# Altium PCB A540R260_Arm6.PcbDoc (part 1 of 2)
Units mm, origin at the board's own origin, x right, y up, seen from the top; angles counter-clockwise.
Board outline 130.45 x 60.2 mm, 4 copper layers (Top Layer, 5V, GND, Bottom Layer), stack 1.741 mm thick; 110 components, 164 nets, 536 pads, 150 vias.
Unrouted connection lines stored in the file: 3.
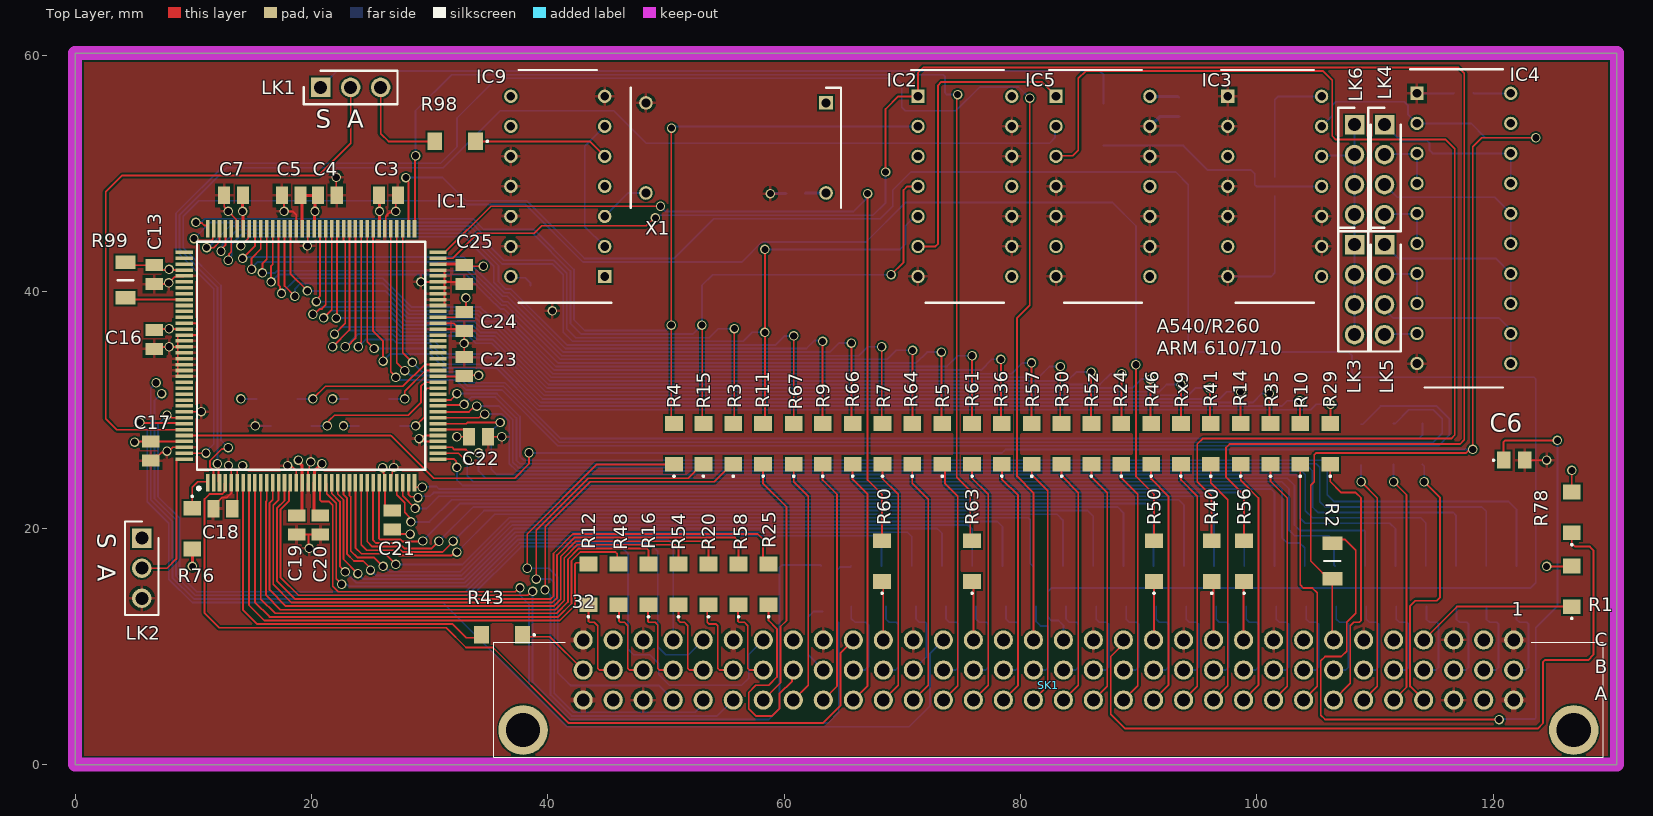
[diagram p0: Top Layer view]
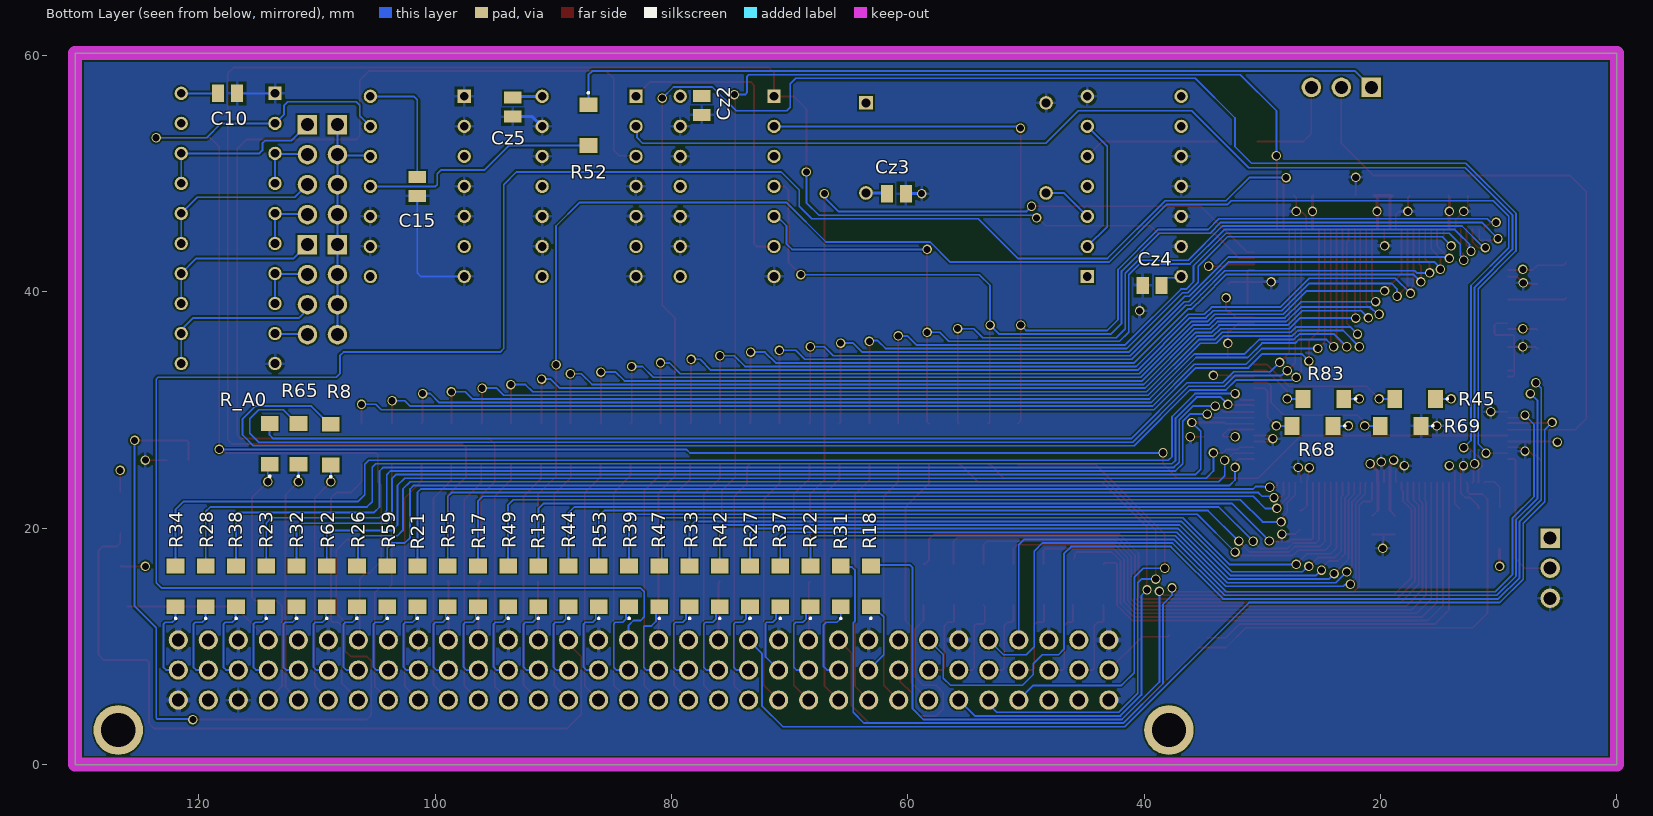
[diagram p1: Bottom Layer view, seen from below]
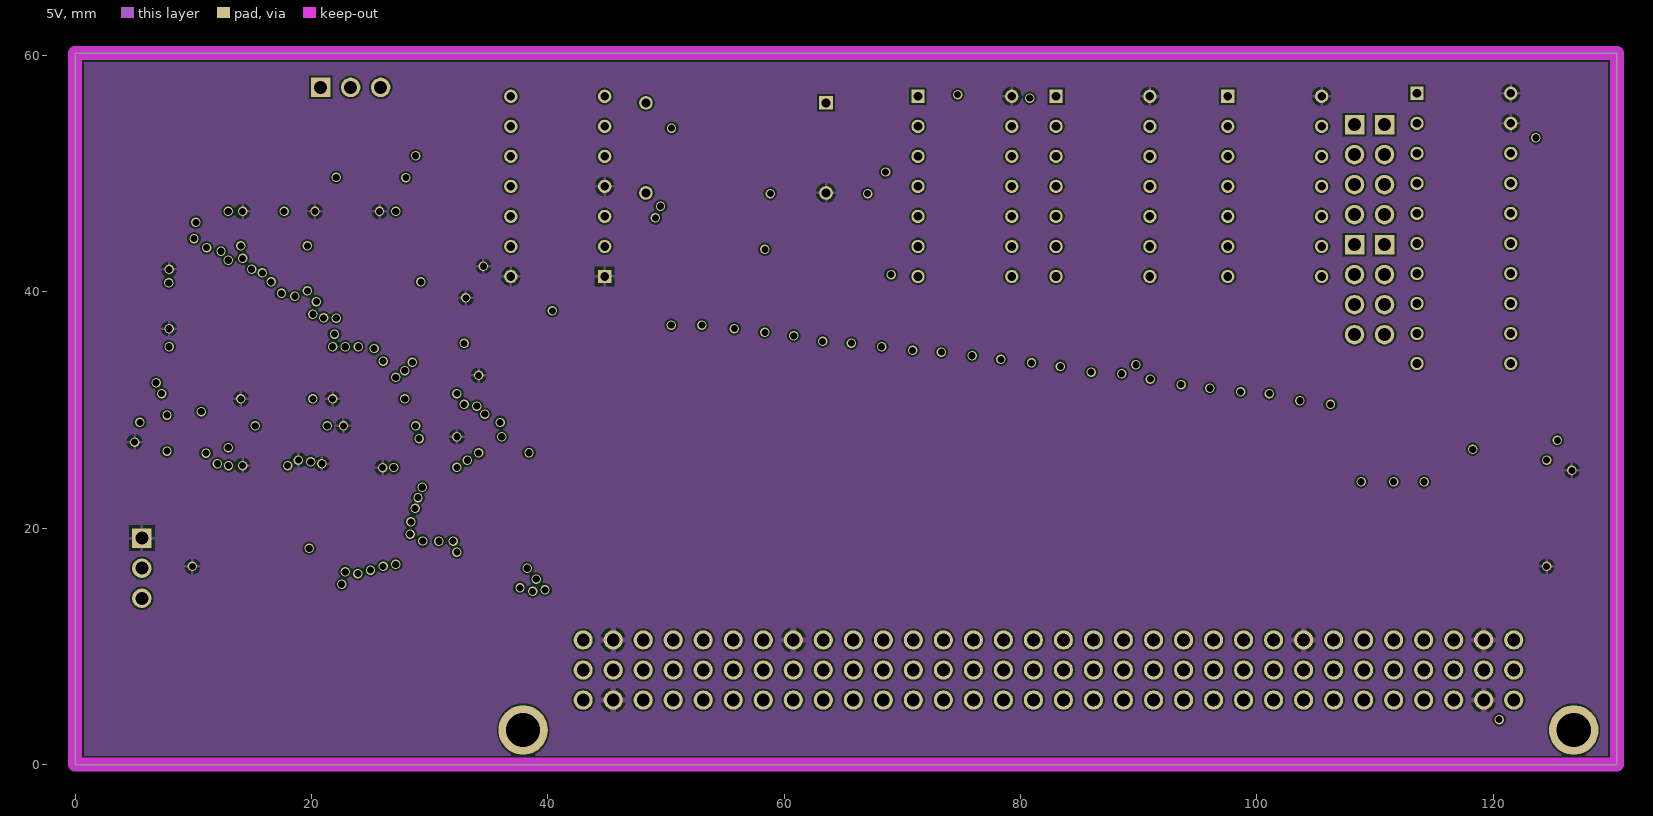
[diagram p2: 5V]
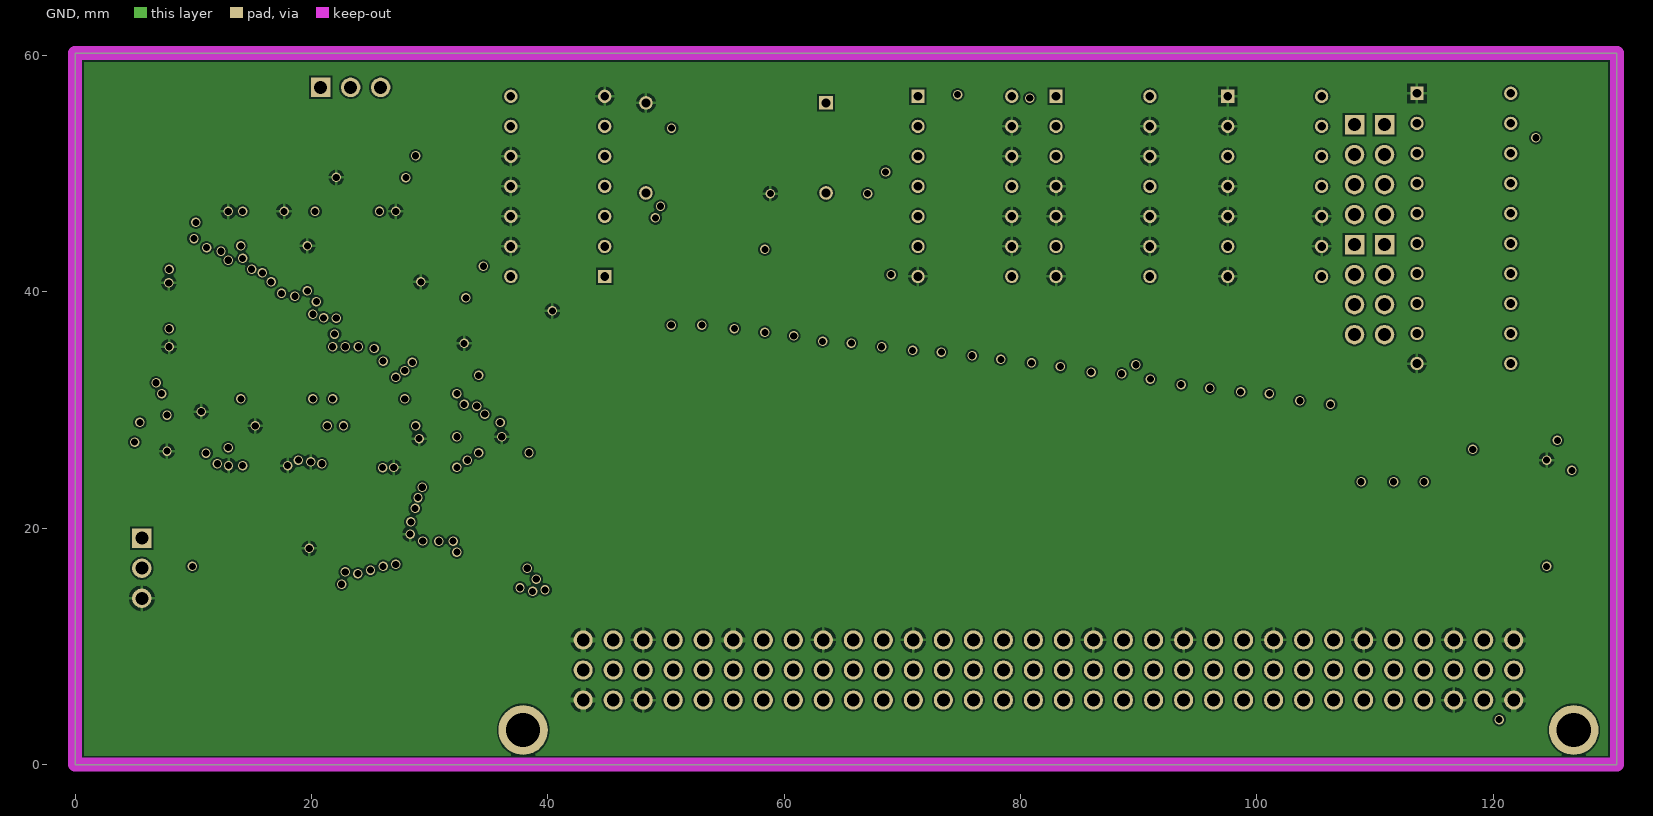
[diagram p3: GND]
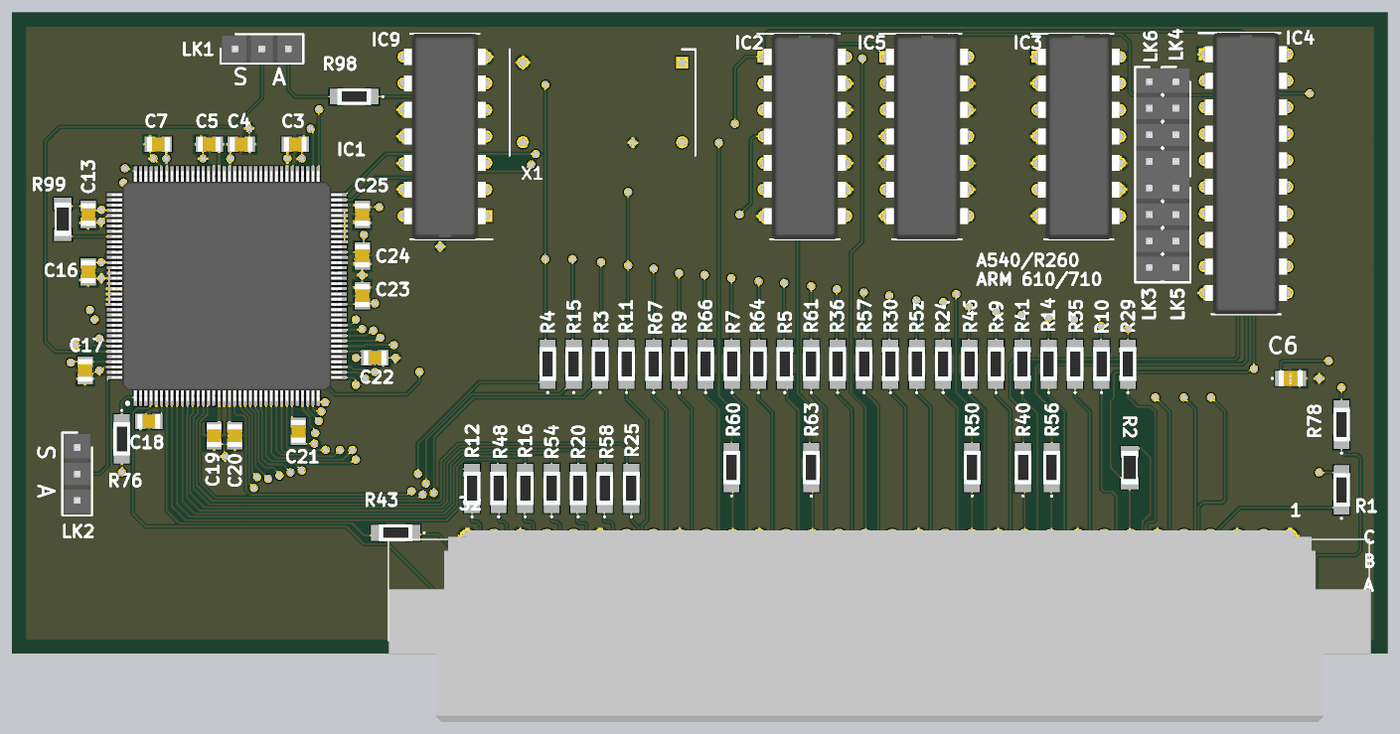
[diagram p5: 3D render of the assembled board from above, using the file's embedded part models]
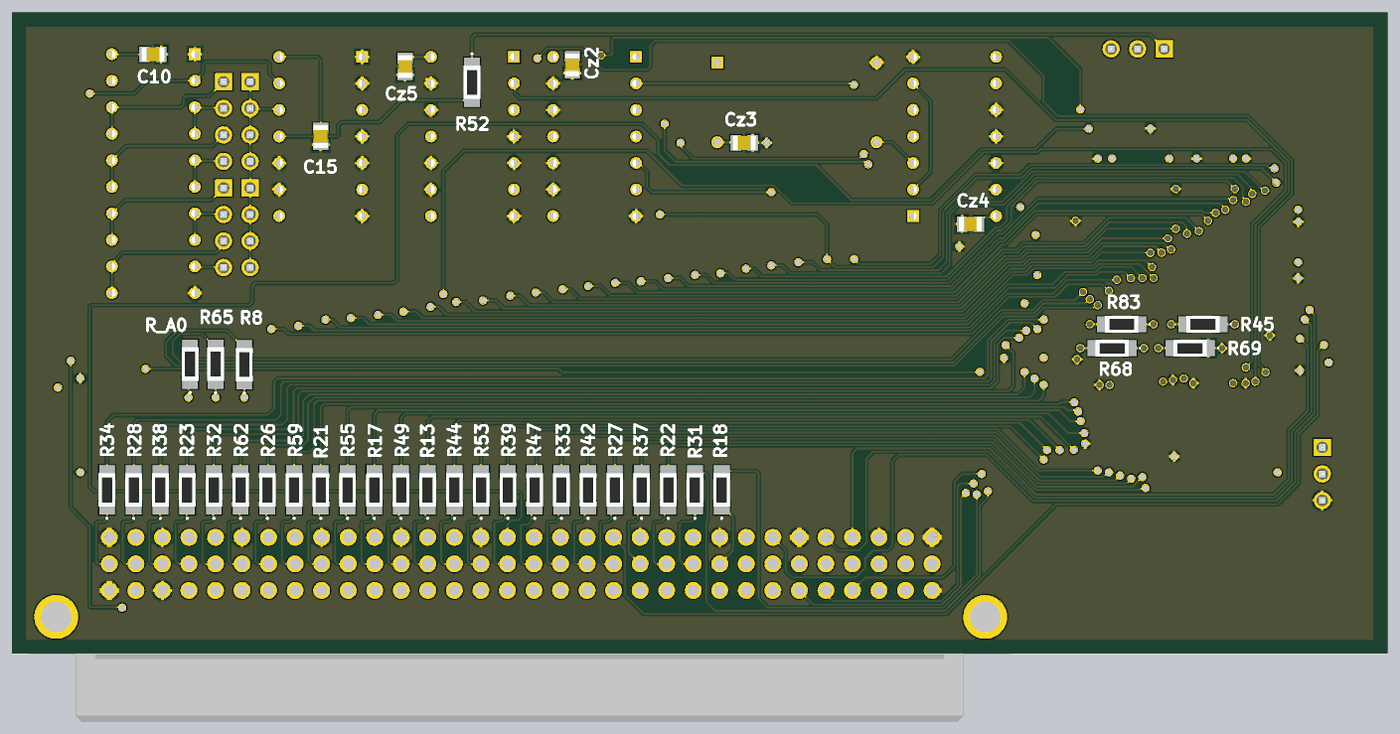
[diagram p6: 3D render of the assembled board from below, using the file's embedded part models]

## Layer stack, top to bottom
Top Solder: solder mask 0.0102, Solder Resist, Dk 3.5
Top Layer: signal copper 0.0356
Dielectric 1: dielectric 0.2, FR-4, Dk 4.8
5V: signal copper 0.035
Dielectric 2: core 1.2, PP-006, Dk 4.1
GND: signal copper 0.035
Dielectric2: dielectric 0.2, FR-4, Dk 4.8
Bottom Layer: signal copper 0.0356
Bottom Solder: solder mask 0.0102, Solder Resist, Dk 3.5

## Board outline
0,60.198 0,0 130.454,0 130.454,60.198

## Design rules (kind name [scope] priority, off if disabled: settings)
Clearance [All] p1: gap=0.152 ignorepadtopadclearanceinfootprint=FALSE
HoleSize [All] p1: absolutevalues=TRUE maxlimit=12.7 minlimit=0.025 maxpercent=80.000 minpercent=20.000
HoleToHoleClearance [All] p1: gap=0.152 allowstackedmicrovias=TRUE
MinimumSolderMaskSliver [All] p1: minsoldermaskwidth=0.025
PolygonConnect [All] p1: connectstyle=Relief reliefconductorwidth=0.254 reliefentries=4 polygonreliefangle="90 Angle" airgapwidth=0.254
RoutingVias [All] p1: holewidth=0.3 width=0.6 viastyle="Through Hole" minholewidth=0.711 minwidth=1.27 maxholewidth=0.711 maxwidth=1.27
SilkToSilkClearance [All] p1 off: silktosilkclearance=0.254
SilkToSolderMaskClearance [IsPad] p1: minsilkscreentomaskgap=0.025 clearancetoexposedcopper=TRUE
SolderMaskExpansion [All] p1: expansion=0.102 istentingtop=FALSE
SupplyNets "Schematic Supply Nets_1" [InNet('5V')] p1: voltage=0.000
SupplyNets "Schematic Supply Nets" [InNet('GND')] p2: voltage=0.000
Width [All] p1: maxlimit=0.254 minlimit=0.152 preferedwidth=0.152
25 further rules are at their usual default settings.

## Classes and differential pairs
component class Glue: C10 C15 Cz2 Cz3 Cz4 Cz5 IC2 IC3 IC4 IC5 IC9 LK3 LK4 LK5 LK6 R52 R98 X1
component class Arm: C3 C4 C5 C6 C7 C13 C16 C17 C18 C19 C20 C21 C22 C23 C24 C25 IC1 LK1 LK2 R1 R2 R3 R4 R5 R5z R7 R8 R9 R10 R11 R12 R13 R14 R15 R16 R17 R18 R20 R21 R22 R23 R24 R25 R26 R27 R28 R29 R30 R31 R32 R33 R34 R35 R36 R37 R38 R39 R40 R41 R42 R43 R44 R45 R46 R47 R48 R49 R50 R53 R54 R55 R56 R57 R58 R59 R60 R61 R62 R63 R64 R65 R66 R67 R68 R69 R76 R78 R83 R99 R_A0 Rx9 SK1 SK?

## Components (designator, comment, footprint, x,y, rotation, side; value= is the part's Value field where it differs from the comment)
C3 "100nF 0805" CAPC2012X140N 26.518,48.158 r180 top
C4 "100nF 0805" CAPC2012X140N 21.336,48.158 r180 top
C5 "100nF 0805" CAPC2012X140N 18.288,48.158 r0 top
C6 "22pF" C0805 121.768,25.756 r0 top
C7 "100nF 0805" CAPC2012X140N 13.411,48.158 r0 top
C10 "100nF 0805" CAPC2012X140N 117.551,56.794 r0 bottom
C13 "100nF 0805" CAPC2012X140N 6.706,41.453 r90 top
C15 "100nF 0805" CAPC2012X140N 101.498,48.92 r90 bottom
C16 "100nF 0805" CAPC2012X140N 6.706,35.966 r90 top
C17 "100nF 0805" CAPC2012X140N 6.401,26.518 r90 top
C18 "100nF 0805" CAPC2012X140N 12.497,21.641 r0 top
C19 "100nF 0805" CAPC2012X140N 18.745,20.269 r90 top
C20 "100nF 0805" CAPC2012X140N 20.726,20.269 r90 top
C21 "100nF 0805" CAPC2012X140N 26.822,20.688 r90 top
C22 "100nF 0805" CAPC2012X140N 34.138,27.737 r180 top
C23 "100nF 0805" CAPC2012X140N 32.918,33.68 r270 top
C24 "100nF 0805" CAPC2012X140N 32.918,37.49 r90 top
C25 "100nF 0805" CAPC2012X140N 32.918,41.453 r90 top
Cz2 "100nF 0805" CAPC2012X140N 77.419,55.778 r90 bottom
Cz3 "100nF 0805" CAPC2012X140N 60.96,48.311 r0 bottom
Cz4 "100nF" CAPC2012X140N 39.319,40.538 r0 bottom
Cz5 "100nF 0805" CAPC2012X140N 93.421,55.626 r90 bottom
IC1 "ARM610" TQFP144 19.964,34.595 r90 top locked
IC2 "SN74HC20N" DIP794W53P254L1930H508Q14N 75.286,48.92 r0 top locked
IC3 "SN74AC86NE4" DIP794W53P254L1930H508Q14N 101.498,48.92 r0 top locked
IC4 "SN74AC241NE4" DIP794W53P254L2540H508Q20N 117.508,45.364 r0 top locked
IC5 "SN74ACT08N-NG" DIP794W53P254L1930H508Q14N 86.97,48.92 r0 top locked
IC9 "CD74ACT74E" DIP794W53P254L1930H508Q14N 40.836,48.92 r180 top
LK1 "PREC003SAAN-RC" HDRV3W64P0X254_1X3_762X254X868P 20.777,57.302 r0 top
LK2 "PREC003SAAN-RC" HDRV3W64P0X254_1X3_762X254X868P 5.639,19.152 r270 top
LK3 "PREC004SAAN-RC" HDRV4W64P0X254_1X4_1016X254X854P 108.255,43.993 r90 top locked
LK4 "PREC004SAAN-RC" HDRV4W64P0X254_1X4_1016X254X854P 110.795,54.153 r90 top locked
LK5 "PREC004SAAN-RC" HDRV4W64P0X254_1X4_1016X254X854P 110.795,43.993 r90 top locked
LK6 "PREC004SAAN-RC" HDRV4W64P0X254_1X4_1016X254X854P 108.255,54.153 r90 top locked
R1 "10K 1206" ERJUP8 126.644,15.088 r90 top
R2 "100R 1206" RESC3216X70N 106.375,17.221 r90 top
R3 "22R 1206" ERJUP8 55.688,27.127 r90 top
R4 "22R 1206" ERJUP8 50.673,27.127 r90 top
R5 "22R 1206" ERJUP8 73.366,27.127 r90 top
R5z "22R 1206" ERJUP8 85.993,27.127 r90 top
R7 "22R 1206" ERJUP8 68.315,27.127 r90 top
R8 "22R 1206" ERJUP8 108.814,27.079 r90 bottom
R9 "22R 1206" ERJUP8 63.264,27.127 r90 top
R10 "22R 1206" ERJUP8 103.672,27.127 r90 top
R11 "22R 1206" ERJUP8 58.213,27.127 r90 top
R12 "22R 1206" ERJUP8 43.434,15.24 r90 top
R13 "22R 1206" ERJUP8 91.258,15.088 r90 bottom
R14 "22R 1206" ERJUP8 98.621,27.127 r90 top
R15 "22R 1206" ERJUP8 53.162,27.127 r90 top
R16 "22R 1206" ERJUP8 48.514,15.24 r90 top
R17 "22R 1206" ERJUP8 96.374,15.088 r90 bottom
R18 "22R 1206" ERJUP8 63.119,15.088 r90 bottom
R20 "22R 1206" ERJUP8 53.594,15.24 r90 top
R21 "22R 1206" ERJUP8 101.49,15.088 r90 bottom
R22 "22R 1206" ERJUP8 68.235,15.088 r90 bottom
R23 "22R 1206" ERJUP8 114.28,15.088 r90 bottom
R24 "22R 1206" ERJUP8 88.519,27.127 r90 top
R25 "22R 1206" ERJUP8 58.674,15.24 r90 top
R26 "22R 1206" ERJUP8 106.606,15.088 r90 bottom
R27 "22R 1206" ERJUP8 73.351,15.088 r90 bottom
R28 "22R 1206" ERJUP8 119.396,15.088 r90 bottom
R29 "22R 1206" ERJUP8 106.197,27.127 r90 top
R30 "22R 1206" ERJUP8 83.468,27.127 r90 top
R31 "22R 1206" ERJUP8 65.677,15.088 r90 bottom
R32 "22R 1206" ERJUP8 111.722,15.088 r90 bottom
R33 "22R 1206" ERJUP8 78.467,15.088 r90 bottom
R34 "22R 1206" ERJUP8 121.954,15.088 r90 bottom
R35 "22R 1206" ERJUP8 101.146,27.127 r90 top
R36 "22R 1206" ERJUP8 78.417,27.127 r90 top
R37 "22R 1206" ERJUP8 70.793,15.088 r90 bottom
R38 "22R 1206" ERJUP8 116.838,15.088 r90 bottom
R39 "22R 1206" ERJUP8 83.583,15.088 r90 bottom
R40 "22R 1206" ERJUP8 96.164,17.221 r90 top
R41 "22R 1206" ERJUP8 96.095,27.127 r90 top
R42 "22R 1206" ERJUP8 75.909,15.088 r90 bottom
R43 "22R 1206" ERJUP8 36.119,10.973 r180 top
R44 "22R 1206" ERJUP8 88.7,15.088 r90 bottom
R45 "10K 1206" ERJUP8 17.069,30.937 r0 bottom
R46 "22R 1206" ERJUP8 91.044,27.127 r90 top
R47 "22R 1206" ERJUP8 81.025,15.088 r90 bottom
R48 "22R 1206" ERJUP8 45.974,15.24 r90 top
R49 "22R 1206" ERJUP8 93.816,15.088 r90 bottom
R50 "22R 1206" ERJUP8 91.288,17.221 r90 top
R52 "22R 1206" ERJUP8 87.02,54.102 r270 bottom
R53 "22R 1206" ERJUP8 86.141,15.088 r90 bottom
R54 "22R 1206" ERJUP8 51.054,15.24 r90 top
R55 "22R 1206" ERJUP8 98.932,15.088 r90 bottom
R56 "22R 1206" ERJUP8 98.908,17.221 r90 top
R57 "22R 1206" ERJUP8 80.943,27.127 r90 top
R58 "22R 1206" ERJUP8 56.134,15.24 r90 top
R59 "22R 1206" ERJUP8 104.048,15.088 r90 bottom
R60 "22R 1206" ERJUP8 68.275,17.221 r90 top
R61 "22R 1206" ERJUP8 75.892,27.127 r90 top
R62 "22R 1206" ERJUP8 109.164,15.088 r90 bottom
R63 "22R 1206" ERJUP8 75.895,17.221 r90 top
R64 "22R 1206" ERJUP8 70.841,27.127 r90 top
R65 "22R 1206" ERJUP8 111.557,27.127 r90 bottom
R66 "22R 1206" ERJUP8 65.79,27.127 r90 top
R67 "22R 1206" ERJUP8 60.808,27.127 r90 top
R68 "10K 1206" ERJUP8 25.756,28.651 r0 bottom
R69 "10K 1206" ERJUP8 18.288,28.651 r0 bottom
R76 "10K 1206" ERJUP8 9.906,19.964 r270 top
R78 "10K 1206" ERJUP8 126.644,21.336 r90 top
R83 "10K 1206" ERJUP8 24.841,30.937 r0 bottom
R98 "22R 1206" ERJUP8 32.156,52.73 r180 top
R99 "100R 1206" RESC3216X70N 4.267,40.996 r270 top
R_A0 "22R 1206" ERJUP8 113.995,27.127 r90 bottom
Rx9 "22R 1206" ERJUP8 93.57,27.127 r90 top
SK1 "5650461-4 / 5650895-4" 56504614 121.727,5.461 r0 top locked
X1 "60MHz OSC" DIPS762W56P1524L1778H241Q4N 63.537,55.987 r270 top

## Footprints (in the part's own frame and the unit in brackets; to place one, negate y for a bottom-side part, rotate by r counter-clockwise, add the part's x,y. Pads: shape width x height; smd on the part's side, far side on the other; paste and mask are expansions set on the pad)
56504614 [mm]
  round 1.62 hole 1.08: A1(0,0) A2(-2.54,0) A3(-5.08,0) A4(-7.62,0) A5(-10.16,0) A6(-12.7,0) A7(-15.24,0) A8(-17.78,0) A9(-20.32,0) A10(-22.86,0) A11(-25.4,0) A12(-27.94,0) A13(-30.48,0) A14(-33.02,0) A15(-35.56,0) A16(-38.1,0) A17(-40.64,0) A18(-43.18,0) A19(-45.72,0) A20(-48.26,0) A21(-50.8,0) A22(-53.34,0) A23(-55.88,0) A24(-58.42,0) A25(-60.96,0) A26(-63.5,0) A27(-66.04,0) A28(-68.58,0) A29(-71.12,0) A30(-73.66,0) A31(-76.2,0) A32(-78.74,0) B1(0,2.54) B2(-2.54,2.54) B3(-5.08,2.54) B4(-7.62,2.54) B5(-10.16,2.54) B6(-12.7,2.54) B7(-15.24,2.54) B8(-17.78,2.54) B9(-20.32,2.54) B10(-22.86,2.54) B11(-25.4,2.54) B12(-27.94,2.54) B13(-30.48,2.54) B14(-33.02,2.54) B15(-35.56,2.54) B16(-38.1,2.54) B17(-40.64,2.54) B18(-43.18,2.54) B19(-45.72,2.54) B20(-48.26,2.54) B21(-50.8,2.54) B22(-53.34,2.54) B23(-55.88,2.54) B24(-58.42,2.54) B25(-60.96,2.54) B26(-63.5,2.54) B27(-66.04,2.54) B28(-68.58,2.54) B29(-71.12,2.54) B30(-73.66,2.54) B31(-76.2,2.54) B32(-78.74,2.54) C1(0,5.08) C2(-2.54,5.08) C3(-5.08,5.08) C4(-7.62,5.08) C5(-10.16,5.08) C6(-12.7,5.08) C7(-15.24,5.08) C8(-17.78,5.08) C9(-20.32,5.08) C10(-22.86,5.08) C11(-25.4,5.08) C12(-27.94,5.08) C13(-30.48,5.08) C14(-33.02,5.08) C15(-35.56,5.08) C16(-38.1,5.08) C17(-40.64,5.08) C18(-43.18,5.08) C19(-45.72,5.08) C20(-48.26,5.08) C21(-50.8,5.08) C22(-53.34,5.08) C23(-55.88,5.08) C24(-58.42,5.08) C25(-60.96,5.08) C26(-63.5,5.08) C27(-66.04,5.08) C28(-68.58,5.08) C29(-71.12,5.08) C30(-73.66,5.08) C31(-76.2,5.08) C32(-78.74,5.08)
  round 4.2 hole 2.89: MH1(5.08,-2.54) MH2(-83.82,-2.54)
  silkscreen extent -86.31,-4.83 7.57,4.88, body extent -86.26,-12.61 7.72,5.75, height 9.21
C0805 [mm]
  rect 1.15x1.45 smd: 1(-0.9,0) 2(0.9,0)
  silkscreen extent -1.8,-0.05 -1.7,0.05, body extent -1.15,-0.78 1.15,0.77, height 0.98
CAPC2012X140N [mm]
  rect 1.02x1.47 smd: 1(-0.8,0) 2(0.8,0)
  body extent -1.1,-0.7 1.1,0.7, height 1.45
DIP794W53P254L1930H508Q14N [mm]
  rect 1.13x1.13 hole 0.73: 1(-3.97,7.62)
  round 1.13 hole 0.73: 2(-3.97,5.08) 3(-3.97,2.54) 4(-3.97,0) 5(-3.97,-2.54) 6(-3.97,-5.08) 7(-3.97,-7.62) 8(3.97,-7.62) 9(3.97,-5.08) 10(3.97,-2.54) 11(3.97,0) 12(3.97,2.54) 13(3.97,5.08) 14(3.97,7.62)
  silkscreen extent -4.53,-9.84 3.3,9.84, body extent -3.94,-9.84 3.94,9.84, height 5.27
DIP794W53P254L2540H508Q20N [mm]
  rect 1.13x1.13 hole 0.73: 1(-3.97,11.43)
  round 1.13 hole 0.73: 2(-3.97,8.89) 3(-3.97,6.35) 4(-3.97,3.81) 5(-3.97,1.27) 6(-3.97,-1.27) 7(-3.97,-3.81) 8(-3.97,-6.35) 9(-3.97,-8.89) 10(-3.97,-11.43) 11(3.97,-11.43) 12(3.97,-8.89) 13(3.97,-6.35) 14(3.97,-3.81) 15(3.97,-1.27) 16(3.97,1.27) 17(3.97,3.81) 18(3.97,6.35) 19(3.97,8.89) 20(3.97,11.43)
  silkscreen extent -4.53,-13.46 3.3,13.46, body extent -3.94,-13.46 3.94,13.46, height 5.09
DIPS762W56P1524L1778H241Q4N [mm]
  rect 1.15x1.15 hole 0.75: 1(0,0)
  round 1.15 hole 0.75: 2(0,-15.24) 4(7.62,0) ""(7.62,-15.24)
  silkscreen extent -1.27,-16.51 8.89,1.27
ERJUP8 [mm]
  rect 1.25x1.5 smd: 1(-1.725,0) 2(1.725,0)
  silkscreen extent -2.77,-0.05 -2.68,0.05, body extent -1.6,-0.8 1.6,0.8, height 0.6
HDRV3W64P0X254_1X3_762X254X868P [mm]
  rect 1.65x1.65 hole 1.1: 1(0,0)
  round 1.65 hole 1.1: 2(2.54,0) 3(5.08,0)
  silkscreen extent -1.42,-1.42 6.5,1.42, body extent -1.27,-1.27 6.35,1.27, height 8.68
HDRV4W64P0X254_1X4_1016X254X854P [mm]
  rect 1.65x1.65 hole 1.1: 1(0,0)
  round 1.65 hole 1.1: 2(-2.54,0) 3(-5.08,0) 4(-7.62,0)
  silkscreen extent -9.04,-1.37 1.42,1.37, body extent -8.89,-1.27 1.27,1.27, height 8.54
RESC3216X70N [mm]
  rect 1.15x1.7 smd: 1(-1.5,0) 2(1.5,0)
  silkscreen extent 0,-0.67 0,0.67, body extent -1.6,-0.8 1.6,0.8, height 0.6
TQFP144 [mm]
  rect 1.475x0.3 smd: 1(-10.738,8.75) 2(-10.738,8.25) 3(-10.738,7.75) 4(-10.738,7.25) 5(-10.738,6.75) 6(-10.738,6.25) 7(-10.738,5.75) 8(-10.738,5.25) 9(-10.738,4.75) 10(-10.738,4.25) 11(-10.738,3.75) 12(-10.738,3.25) 13(-10.738,2.75) 14(-10.738,2.25) 15(-10.738,1.75) 16(-10.738,1.25) 17(-10.738,0.75) 18(-10.738,0.25) 19(-10.738,-0.25) 20(-10.738,-0.75) 21(-10.738,-1.25) 22(-10.738,-1.75) 23(-10.738,-2.25) 24(-10.738,-2.75) 25(-10.738,-3.25) 26(-10.738,-3.75) 27(-10.738,-4.25) 28(-10.738,-4.75) 29(-10.738,-5.25) 30(-10.738,-5.75) 31(-10.738,-6.25) 32(-10.738,-6.75) 33(-10.738,-7.25) 34(-10.738,-7.75) 35(-10.738,-8.25) 36(-10.738,-8.75) 73(10.738,-8.75) 74(10.738,-8.25) 75(10.738,-7.75) 76(10.738,-7.25) 77(10.738,-6.75) 78(10.738,-6.25) 79(10.738,-5.75) 80(10.738,-5.25) 81(10.738,-4.75) 82(10.738,-4.25) 83(10.738,-3.75) 84(10.738,-3.25) 85(10.738,-2.75) 86(10.738,-2.25) 87(10.738,-1.75) 88(10.738,-1.25) 89(10.738,-0.75) 90(10.738,-0.25) 91(10.738,0.25) 92(10.738,0.75) 93(10.738,1.25) 94(10.738,1.75) 95(10.738,2.25) 96(10.738,2.75) 97(10.738,3.25) 98(10.738,3.75) 99(10.738,4.25) 100(10.738,4.75) 101(10.738,5.25) 102(10.738,5.75) 103(10.738,6.25) 104(10.738,6.75) 105(10.738,7.25) 106(10.738,7.75) 107(10.738,8.25) 108(10.738,8.75)
  rect 0.3x1.475 smd: 37(-8.75,-10.738) 38(-8.25,-10.738) 39(-7.75,-10.738) 40(-7.25,-10.738) 41(-6.75,-10.738) 42(-6.25,-10.738) 43(-5.75,-10.738) 44(-5.25,-10.738) 45(-4.75,-10.738) 46(-4.25,-10.738) 47(-3.75,-10.738) 48(-3.25,-10.738) 49(-2.75,-10.738) 50(-2.25,-10.738) 51(-1.75,-10.738) 52(-1.25,-10.738) 53(-0.75,-10.738) 54(-0.25,-10.738) 55(0.25,-10.738) 56(0.75,-10.738) 57(1.25,-10.738) 58(1.75,-10.738) 59(2.25,-10.738) 60(2.75,-10.738) 61(3.25,-10.738) 62(3.75,-10.738) 63(4.25,-10.738) 64(4.75,-10.738) 65(5.25,-10.738) 66(5.75,-10.738) 67(6.25,-10.738) 68(6.75,-10.738) 69(7.25,-10.738) 70(7.75,-10.738) 71(8.25,-10.738) 72(8.75,-10.738) 109(8.75,10.738) 110(8.25,10.738) 111(7.75,10.738) 112(7.25,10.738) 113(6.75,10.738) 114(6.25,10.738) 115(5.75,10.738) 116(5.25,10.738) 117(4.75,10.738) 118(4.25,10.738) 119(3.75,10.738) 120(3.25,10.738) 121(2.75,10.738) 122(2.25,10.738) 123(1.75,10.738) 124(1.25,10.738) 125(0.75,10.738) 126(0.25,10.738) 127(-0.25,10.738) 128(-0.75,10.738) 129(-1.25,10.738) 130(-1.75,10.738) 131(-2.25,10.738) 132(-2.75,10.738) 133(-3.25,10.738) 134(-3.75,10.738) 135(-4.25,10.738) 136(-4.75,10.738) 137(-5.25,10.738) 138(-5.75,10.738) 139(-6.25,10.738) 140(-6.75,10.738) 141(-7.25,10.738) 142(-7.75,10.738) 143(-8.25,10.738) 144(-8.75,10.738)
  silkscreen extent -11.35,-9.65 9.65,9.65, body extent -11,-11 11,11, height 1.51

## Part data
C3 C4 C5 C7 C10 C13 C15 C16 C17 C18 C19 C20 C21 C22 C23 C24 C25 Cz2 Cz3 Cz5: library part C0805C104J4JACAUTO, "Capacitor", Manufacturer_Name=KEMET, Mouser Part Number=80-C0805C104J4JAUTO, Arrow Part Number=C0805C104J4JACAUTO, Arrow Price/Stock=https://www.arrow.com/en/products/c0805c104j4jacauto/kemet-corporation?region=nac, Datasheet Link=https://content.kemet.com/datasheets/KEM_C1091_C0G_ESD.pdf, Height=1.4mm, Manufacturer_Part_Number=C0805C104J4JACAUTO, Mouser Price/Stock=https://www.mouser.co.uk/ProductDetail/KEMET/C0805C104J4JACAUTO?qs=MyNHzdoqoQKNICuQqAIXfA%3D%3D
C6: library part C0805X220K3GACTU, "Capacitor", Manufacturer_Name=KEMET, Datasheet Link=https://content.kemet.com/datasheets/KEM_C1062_C0G_FT-CAP_SMD.pdf, Height=1.1mm, Manufacturer_Part_Number=C0805X220K3GACTU
Cz4: library part C2012X7R1H104K125AM, "Capacitor", Manufacturer_Name=TDK, Mouser Part Number=810-C2012X7R1H104KT5, Arrow Part Number=C2012X7R1H104K125AM, Arrow Price/Stock=https://www.arrow.com/en/products/c2012x7r1h104k125am/tdk, Datasheet Link=https://product.tdk.com/info/en/catalog/datasheets/mlcc_commercial_midvoltage_en.pdf, Height=1.45mm, Manufacturer_Part_Number=C2012X7R1H104K125AM, Mouser Price/Stock=https://www.mouser.com/Search/Refine.aspx?Keyword=810-C2012X7R1H104KT5
IC1: library part VY86C610, Manufacturer_Name=VLSI, Manufacturer_Part_Number=VY86C610C, Height=1.6mm
IC2: "Integrated Circuit", Manufacturer_Name="Texas Instruments", Mouser Part Number=595-SN74HC20N, Arrow Part Number=SN74HC20N, Arrow Price/Stock=https://www.arrow.com/en/products/sn74hc20n/texas-instruments, Datasheet Link=http://www.ti.com/lit/gpn/sn74hc20, Height=5.08mm, Manufacturer_Part_Number=SN74HC20N, Mouser Price/Stock=https://www.mouser.co.uk/ProductDetail/Texas-Instruments/SN74HC20N?qs=pt%2FIv5r0EPf8TTavFR1q%252Bw%3D%3D
IC3 IC4 IC5: "Integrated Circuit", Manufacturer_Name="Texas Instruments", Height=5.08mm
  IC3: Datasheet Link=https://www.ti.com/lit/ds/symlink/sn74ac86.pdf?HQS=dis-dk-null-digikeymode-dsf-pf-null-wwe&ts=1642844260121&ref_url=https%253A%252F%252Fwww.ti.com%252Fgeneral%252Fdocs%252Fsuppproductinfo.tsp%253FdistId%253D10%2526gotoUrl%253Dhttps%253A%252F%252Fwww.ti.co, Manufacturer_Part_Number=SN74AC86NE4
  IC4: Arrow Part Number=SN74AC241NE4, Arrow Price/Stock=https://www.arrow.com/en/products/sn74ac241ne4/texas-instruments, Datasheet Link=https://www.ti.com/lit/ds/scas513e/scas513e.pdf, Manufacturer_Part_Number=SN74AC241NE4
  IC5: Datasheet Link=https://www.ti.com/lit/ds/symlink/sn74act08.pdf?HQS=dis-mous-null-mousermode-dsf-pf-null-wwe&ts=1653633689080&ref_url=https%253A%252F%252Fwww.mouser.in%252F, Manufacturer_Part_Number=SN74ACT08N-NG
IC9: "Integrated Circuit", Manufacturer_Name="Texas Instruments", Mouser Part Number=595-CD74ACT74E, Arrow Part Number=CD74ACT74E, Arrow Price/Stock=https://www.arrow.com/en/products/cd74act74e/texas-instruments?region=nac, Datasheet Link=http://www.ti.com/lit/ds/symlink/cd74act74.pdf, Height=5.08mm, Manufacturer_Part_Number=CD74ACT74E, Mouser Price/Stock=https://www.mouser.co.uk/ProductDetail/Texas-Instruments/CD74ACT74E?qs=KaAwwOlwapulo9KBjJbamw%3D%3D
LK1 LK2 LK3 LK4 LK5 LK6: "Connector", Manufacturer_Name=Sullins
  LK1 LK2: Datasheet Link=https://media.digikey.com/PDF/Data%20Sheets/Sullins%20PDFs/z%20RzCzzzSzzN-RC,%20ST,11635-B.pdf, Height=8.68mm, Manufacturer_Part_Number=PREC003SAAN-RC
  LK3 LK4 LK5 LK6: Datasheet Link=https://drawings-pdf.s3.amazonaws.com/11635.pdf, Height=8.54mm, Manufacturer_Part_Number=PREC004SAAN-RC
R1 R45 R68 R69 R76 R78 R83: library part ERJ-UP8D1002V, "Resistor", Manufacturer_Name=Panasonic, Datasheet Link=https://industrial.panasonic.com/cdbs/www-data/pdf/RDP0000/AOA0000C337.pdf, Height=0.7mm, Manufacturer_Part_Number=ERJ-UP8D1002V
R2 R99: library part ERA-8AEB101V, "Resistor", Manufacturer_Name=Panasonic, Mouser Part Number=667-ERA-8AEB101V, Arrow Part Number=ERA-8AEB101V, Arrow Price/Stock=https://www.arrow.com/en/products/era8aeb101v/panasonic?region=europe, Datasheet Link=https://industrial.panasonic.com/cdbs/www-data/pdf/RDM0000/AOA0000C307.pdf, Height=0.7mm, Manufacturer_Part_Number=ERA-8AEB101V, Mouser Price/Stock=https://www.mouser.co.uk/ProductDetail/Panasonic/ERA-8AEB101V?qs=Ojoo2rCVP9RpW8HgSjFLGA%3D%3D
R3 R4 R5 R5z R7 R8 R9 R10 R11 R12 R13 R14 R15 R16 R17 R18 R20 R21 R22 R23 R24 R25 R26 R27 R28 R29 R30 R31 R32 R33 R34 R35 R36 R37 R38 R39 R40 R41 R42 R43 R44 R46 R47 R48 R49 R50 R52 R53 R54 R55 R56 R57 R58 R59 R60 R61 R62 R63 R64 R65 R66 R67 R98 R_A0 Rx9: library part ERJ-UP8D22R0V, "Resistor", Manufacturer_Name=Panasonic, Datasheet Link=https://industrial.panasonic.com/cdbs/www-data/pdf/RDP0000/AOA0000C337.pdf, Height=0.7mm, Manufacturer_Part_Number=ERJ-UP8D22R0V
SK1: library part 5650461-4, "Connector", Manufacturer_Name="TE Connectivity", Mouser Part Number=571-5650461-4, Arrow Part Number=5650461-4, Arrow Price/Stock=https://www.arrow.com/en/products/5650461-4/te-connectivity, Datasheet Link=https://componentsearchengine.com/Datasheets/2/5650461-4.pdf, Height=10.49mm, Manufacturer_Part_Number=5650461-4, Mouser Price/Stock=https://www.mouser.co.uk/ProductDetail/TE-Connectivity/5650461-4?qs=xrnNvQC1SKQ%2FjdFwmiH0Uw%3D%3D
X1: library part 1107741, Manufacturer_Name=ARIES, Mouser Part Number=535-1107741, Datasheet Link=http://docs-emea.rs-online.com/webdocs/13f3/0900766b813f3237.pdf, Height=2.41mm, Manufacturer_Part_Number=1107741, Mouser Price/Stock=https://www.mouser.co.uk/ProductDetail/Aries-Electronics/1107741?qs=WZRMhwwaLl%2FApwqojhfzdA%3D%3D

## Via types
v1: diameter 0.8, hole 0.6, Top Layer to Bottom Layer, 150 vias

## Nets (pads, with @x,y where several pads share a name; then routed paths per layer and width w, separated by ;. In a path a pad name is that pad's centre, name@x,y a point inside that pad or via, vN(x,y) a via of type N, cw(c..) or ccw(c..) an arc to the next point about the centre after c; other vN are vias at no path point)
5V: C3.2 C4.2 C5.2 C7.2 C10.2 C13.2 C15.2 C16.2 C17.2 C18.2 C19.2 C20.2 C21.2 C22.2 C23.2 C24.2 C25.2 Cz2.2 Cz3.2 Cz4.1 Cz5.2 IC1.6 IC1.17 IC1.19 IC1.31 IC1.42 IC1.51 IC1.61 IC1.70 IC1.79 IC1.90 IC1.92 IC1.102 IC1.112 IC1.122 IC1.141 IC2.14 IC3.14 IC4.19 IC4.20 IC5.14 IC9.1 IC9.4 IC9.14 LK2.1 R1.2 R45.1 R68.1 R76.2 R78.2 R83.1 R99.1 SK1.A2 SK1.A31 SK1.C2 SK1.C8 SK1.C25 SK1.C31 X1.4 | length 88.1
  Top Layer w0.152: R99.1@4.267,42.496 4.51,42.253 C13.2@6.706,42.253 7.114,41.845 IC1.112@9.226,41.845 ; v1(5.029,27.28) 5.094,27.345 IC1.141@9.226,27.345 ; C16.2@6.706,36.766 6.784,36.845 IC1.122@9.226,36.845 ; C18.2@13.297,21.641 13.714,22.058 IC1.6@13.714,23.857 13.714,24.84 v1(14.173,25.298) ; C7.2@14.211,48.158 C7.2@14.214,48.155 ; C19.2@18.745,21.069 18.781,21.069 C19.2@19.214,21.503 ; C5.2@18.936,48.158 19.214,47.88 C5.2@19.367,47.727 ; C20.2@20.214,21.503 20.648,21.069 C20.2@20.726,21.069 ; C4.2@20.214,47.837 C4.2@20.536,48.158 ; v1(26.011,25.127) 26.141,24.518 IC1.31@26.214,23.857 26.214,21.922 26.648,21.488 C21.2@26.822,21.488 ; IC1.42@30.702,28.345 32.904,28.345 33.338,27.911 C22.2@33.338,27.737 v1(32.309,27.737) ; IC1.51@30.702,32.845 32.883,32.845 32.975,32.937 v1(34.138,32.937) ; IC1.61@30.702,37.845 32.248,37.845 32.693,38.29 C24.2@32.918,38.29 33.071,38.443 v1(33.071,39.491) ; C25.2@32.918,42.253 32.918,42.345 33.201,42.062 33.301,42.163 v1(34.543,42.163) ; v1(124.511,16.764) 126.596,16.764 R1.2@126.644,16.813 ; R78.2@126.644,23.061 v1(126.644,24.89)
  Top Layer w0.254: R76.2@9.906,18.239 9.925,18.22 v1(9.925,16.764) ; IC1.102@14.214,45.333 14.194,45.353 14.194,46.785 v1(14.173,46.806) 14.173,47.962 C7.2@14.214,48.003 ; v1(18.898,25.756) 18.898,25.608 19.214,25.291 IC1.17@19.214,23.857 C19.2@19.214,21.503 ; C5.2@19.088,48.158 C4.2@20.536,48.158 ; IC1.92@19.214,45.333 19.214,47.88 C5.2@19.214,47.943 ; C20.2@20.214,21.503 IC1.19@20.214,23.857 20.237,23.88 20.237,24.809 v1(20.879,25.451) ; IC1.90@20.214,45.333 20.237,45.356 20.237,46.748 v1(20.295,46.806) ; v1@20.214,46.806 20.295,46.886 20.295,47.756 C4.2@20.214,47.837 ; IC1.79@25.718,45.336 25.735,45.353 25.735,46.785 v1(25.756,46.806) 25.756,48.12 C3.2@25.718,48.158 ; IC1.70@30.702,42.345 C25.2@32.826,42.345
  Bottom Layer w0.152: v1(14.021,30.937) R45.1@15.344,30.937 ; v1(21.793,30.937) R83.1@23.116,30.937 ; v1(22.708,28.651) R68.1@24.031,28.651 ; IC9.14@36.866,41.3 36.969,41.197 38.085,41.197 38.519,40.763 Cz4.1@38.519,40.538 ; Cz3.2@61.76,48.311 Cz3.2@61.816,48.367 ; Cz5.2@93.307,56.54 Cz5.2@93.421,56.426 ; C15.2@101.498,49.72 101.498,56.236 101.803,56.54 IC3.14@105.468,56.54 ; C10.2@118.3,56.845 C10.2@118.351,56.794 IC4.20@121.478,56.794
  Bottom Layer w0.254: Cz3.2@61.816,48.367 X1.4@63.537,48.367 ; IC5.14@90.94,56.54 Cz5.2@93.307,56.54
  other v1: 7.95,36.874 7.95,41.904
A0: IC1.75 R_A0.2 | length 100.9
  Top Layer w0.152: IC1.75@27.714,45.333 27.714,34.858 v1(28.542,34.031)
  Bottom Layer w0.152: v1(28.542,34.031) 29.335,33.237 32.421,33.237 33.349,32.309 36.371,32.309 41.096,27.584 113.69,27.584 113.995,27.889 R_A0.2@113.995,28.852
A1: IC1.76 R65.2 | length 109
  Top Layer w0.152: IC1.76@27.214,45.333 27.214,34.012 v1(27.889,33.337)
  Bottom Layer w0.152: v1(27.889,33.337) 27.968,33.337 28.373,32.933 32.295,32.933 33.223,32.004 35.94,32.004 36.245,32.004 40.969,27.28 114.91,27.28 115.672,28.042 115.672,29.261 114.91,30.023 112.852,30.023 111.682,28.852 R65.2@111.557,28.852
A2: IC1.77 R8.2 | length 114.6
  Top Layer w0.152: IC1.77@26.714,45.333 26.714,33.242 27.127,32.829 v1(27.127,32.766)
  Bottom Layer w0.152: v1(27.127,32.766) 27.302,32.766 27.54,32.528 32.242,32.528 33.071,31.699 36.119,31.699 40.843,26.975 115.367,26.975 116.281,27.889 116.281,29.261 115.214,30.328 110.463,30.328 108.939,28.804 R8.2@108.814,28.804
A3: IC1.80 R29.2 | length 95.7
  Top Layer w0.152: IC1.80@25.214,45.333 25.214,36.66 26.06,35.814 v1(26.06,34.138) ; R29.2@106.197,28.852 106.223,28.878 v1(106.223,30.48)
  Bottom Layer w0.152: v1(26.06,34.138) 26.67,34.747 29.997,34.747 31.179,33.566 35.624,33.566 39.167,30.023 42.215,30.023 104.546,30.023 105.004,30.48 v1(106.223,30.48)
A4: IC1.81 R10.2 | length 92.9
  Top Layer w0.152: IC1.81@24.714,45.333 24.714,35.788 v1(25.298,35.204) ; v1(103.632,30.785) 103.632,28.892 R10.2@103.672,28.852
  Bottom Layer w0.152: v1(25.298,35.204) 30.049,35.204 31.383,33.871 35.75,33.871 39.293,30.328 102.108,30.328 102.565,30.785 v1(103.632,30.785)
A5: IC1.82 R35.2 | length 92.5
  Top Layer w0.152: v1(23.965,35.357) 23.965,35.52 24.214,35.77 IC1.82@24.214,45.333 ; v1(101.05,31.384) 101.05,28.948 R35.2@101.146,28.852
  Bottom Layer w0.152: v1(23.965,35.357) 24.574,35.966 26.905,35.966 27.21,35.662 30.023,35.662 31.242,34.442 35.609,34.442 39.419,30.632 99.651,30.632 100.413,31.394 v1@101.041,31.394
A6: IC1.83 R14.2 | length 91.8
  Top Layer w0.152: v1(22.86,35.357) 23.012,35.357 23.714,36.059 IC1.83@23.714,45.333 ; v1(98.612,31.537) 98.612,28.861 R14.2@98.621,28.852
  Bottom Layer w0.152: v1(22.86,35.357) 23.927,36.424 26.879,36.424 27.336,35.966 30.264,35.966 31.484,34.747 35.736,34.747 39.546,30.937 96.839,30.937 97.449,31.547 v1@98.603,31.547
A7: IC1.84 R41.2 | length 90.9
  Top Layer w0.152: v1(21.793,35.357) 23.214,36.778 IC1.84@23.214,45.333 ; v1(96.021,31.842) 96.021,28.926 R41.2@96.095,28.852
  Bottom Layer w0.152: v1(21.793,35.357) 23.165,36.728 27.005,36.728 27.463,36.271 33.28,36.271 33.894,35.657 35.257,35.657 39.672,31.242 94.183,31.242 94.793,31.852 v1@96.012,31.852
A8: IC1.85 Rx9.2 | length 87.1
  Top Layer w0.152: v1(21.946,36.424) 22.86,37.338 22.86,44.196 22.714,44.342 IC1.85@22.714,45.333 ; Rx9.2@93.57,28.852 93.583,28.865 v1(93.583,32.146)
  Bottom Layer w0.152: v1(21.946,36.424) 22.555,37.033 27.132,37.033 27.589,36.576 33.406,36.576 34.02,35.962 35.383,35.962 39.798,31.547 91.745,31.547 92.354,32.156 v1@93.574,32.156
A9: IC1.86 R46.2 | length 83.1
  Top Layer w0.152: v1(22.098,37.776) 22.156,37.834 22.156,45.275 IC1.86@22.214,45.333 ; v1(90.983,32.614) 90.983,28.914 R46.2@91.044,28.852
  Bottom Layer w0.152: v1(22.098,37.776) 22.117,37.795 26.801,37.795 27.715,36.881 33.532,36.881 34.147,36.267 35.509,36.267 39.924,31.852 89.459,31.852 90.221,32.614 v1(90.983,32.614)
A10: IC1.87 R24.2 | length 82.8
  Top Layer w0.152: v1(21.031,37.795) 21.714,38.478 IC1.87@21.714,45.333 ; R24.2@88.519,28.852 88.544,28.878 v1(88.544,33.071)
  Bottom Layer w0.152: v1(21.031,37.795) 21.641,38.405 26.622,38.405 27.841,37.186 33.659,37.186 34.273,36.572 35.635,36.572 40.051,32.156 86.716,32.156 87.63,33.071 v1(88.544,33.071)
A11: IC1.88 R5z.2 | length 81.2
  Top Layer w0.152: v1(20.117,38.1) 20.244,38.1 20.702,38.558 20.88,38.558 21.214,38.893 IC1.88@21.214,45.333 ; v1(85.963,33.213) 85.963,28.883 R5z.2@85.993,28.852
  Bottom Layer w0.152: v1(20.117,38.1) 20.244,38.1 20.853,38.71 26.748,38.71 27.968,37.49 33.785,37.49 34.399,36.876 35.762,36.876 40.177,32.461 83.972,32.461 84.734,33.223 v1@85.954,33.223
A12: IC1.89 R30.2 | length 77.1
  Top Layer w0.152: v1(20.422,39.167) 20.422,39.342 20.714,39.635 IC1.89@20.714,45.333 ; v1(83.363,33.68) 83.363,28.957 R30.2@83.468,28.852
  Bottom Layer w0.152: v1(20.422,39.167) 26.722,39.167 28.094,37.795 33.911,37.795 34.525,37.181 35.888,37.181 40.303,32.766 81.534,32.766 82.448,33.68 v1(83.363,33.68)
A13: IC1.94 R57.2 | length 75.5
  Top Layer w0.152: IC1.94@18.214,45.333 18.214,41.526 v1(19.66,40.081) ; v1(80.924,33.985) 80.924,28.87 R57.2@80.943,28.852
  Bottom Layer w0.152: v1(19.66,40.081) 26.239,40.081 28.22,38.1 34.037,38.1 34.652,37.486 36.014,37.486 40.429,33.071 79.248,33.071 80.162,33.985 v1(80.924,33.985)
A14: IC1.95 R36.2 | length 75.5
  Top Layer w0.152: IC1.95@17.714,45.333 17.714,40.502 v1(18.593,39.624) ; v1(78.334,34.29) 78.334,28.936 R36.2@78.417,28.852
  Bottom Layer w0.152: v1(18.593,39.624) 18.612,39.643 18.612,40.253 19.069,40.71 26.041,40.71 28.346,38.405 34.164,38.405 34.778,37.791 36.14,37.791 40.556,33.376 76.657,33.376 77.572,34.29 v1(78.334,34.29)
A15: IC1.96 R61.2 | length 73.8
  Top Layer w0.152: IC1.96@17.214,45.333 17.214,40.57 17.339,40.446 17.339,39.989 v1(17.463,39.865) ; R61.2@75.892,28.852 75.895,28.856 v1(75.895,34.595)
  Bottom Layer w0.152: v1(17.463,39.865) 18.745,41.148 26.034,41.148 28.473,38.71 34.29,38.71 34.904,38.096 36.267,38.096 40.682,33.68 73.762,33.68 74.676,34.595 v1(75.895,34.595)
A16: IC1.97 R5.2 | length 71.1
  Top Layer w0.152: v1(16.586,40.843) 16.586,42.189 16.714,42.318 IC1.97@16.714,45.333 ; v1(73.304,34.9) 73.304,28.914 R5.2@73.366,28.852
  Bottom Layer w0.152: v1(16.586,40.843) 17.214,41.472 33.052,41.472 35.052,39.471 35.966,38.557 36.271,38.557 40.843,33.985 71.171,33.985 72.085,34.9 v1(73.304,34.9)
A17: IC1.98 R64.2 | length 68.6
  Top Layer w0.152: v1(15.85,41.605) 15.85,42.39 16.214,42.755 IC1.98@16.214,45.333 ; R64.2@70.841,28.852 70.866,28.878 v1(70.866,35.052)
  Bottom Layer w0.152: v1(15.85,41.605) 16.917,41.605 17.088,41.777 33.178,41.777 35.179,39.776 35.94,39.014 36.093,38.862 36.476,38.862 41.048,34.29 68.732,34.29 69.494,35.052 v1(70.866,35.052)
A18: IC1.99 R7.2 | length 67.5
  Top Layer w0.152: v1(14.935,41.91) 14.935,42.847 15.714,43.626 IC1.99@15.714,45.333 ; v1(68.247,35.355) 68.247,28.92 R7.2@68.315,28.852
  Bottom Layer w0.152: v1(14.935,41.91) 14.935,42.034 15.421,42.52 32.866,42.52 33.883,41.503 ; 33.881,41.505 35.305,40.081 36.067,39.319 36.219,39.167 36.602,39.167 41.174,34.595 66.294,34.595 67.056,35.357 v1@68.275,35.357
A19: IC1.100 R66.2 | length 65
  Top Layer w0.152: v1(14.173,42.824) 15.214,43.866 IC1.100@15.214,45.333 ; v1(65.684,35.662) 65.684,28.957 R66.2@65.79,28.852
  Bottom Layer w0.152: v1(14.173,42.824) 14.297,42.948 32.868,42.948 34.251,41.566 ; 34.249,41.568 35.431,40.386 36.193,39.624 36.576,39.624 41.3,34.9 63.856,34.9 64.618,35.662 v1(65.684,35.662)
A20: IC1.101 R9.2 | length 63.2
  Top Layer w0.152: v1(14.021,43.891) 14.641,44.511 14.641,45.259 IC1.101@14.714,45.333 ; v1(63.246,35.814) 63.246,28.87 R9.2@63.264,28.852
  Bottom Layer w0.152: v1(14.021,43.891) 14.783,44.653 32.945,44.653 34.252,43.346 34.623,42.973 ; 34.625,42.971 34.625,42.969 35.424,42.171 35.424,40.824 35.557,40.69 36.319,39.929 36.755,39.929 41.479,35.204 61.874,35.204 62.541,35.871 63.189,35.871 v1(63.246,35.814)
A21: IC1.104 R67.2 | length 64.6
  Top Layer w0.152: v1(12.954,42.672) 13.017,42.735 13.017,43.193 13.214,43.39 IC1.104@13.214,45.333 ; R67.2@60.808,28.852 v1(60.808,36.271)
  Bottom Layer w0.152: v1(12.954,42.672) 12.954,42.78 13.259,43.085 13.259,44.044 14.173,44.958 33.071,44.958 35.825,42.204 35.825,40.854 ; 35.823,40.856 36.445,40.234 36.881,40.234 41.605,35.509 59.284,35.509 60.046,36.271 v1(60.808,36.271)
A22: IC1.105 IC2.5 R11.2 | length 86
  Top Layer w0.152: v1(12.344,43.434) 12.344,43.583 12.714,43.953 IC1.105@12.714,45.333 ; R11.2@58.213,28.852 58.369,29.008 v1(58.369,36.576) v1(58.369,43.586)
  Bottom Layer w0.152: v1(12.344,43.434) 12.468,43.558 12.468,44.015 13.411,44.958 13.716,45.263 33.223,45.263 36.119,42.367 40.386,42.367 41.3,41.453 41.3,36.598 42.084,35.814 56.54,35.814 57.302,36.576 v1(58.369,36.576) ; v1(58.369,43.586) 69.799,43.586 70.256,44.044 70.256,45.568 71.069,46.38 IC2.5@71.316,46.38
A23: IC1.106 R3.2 | length 62.9
  Top Layer w0.152: v1(11.125,43.738) 11.734,43.738 12.214,44.218 IC1.106@12.214,45.333 ; R3.2@55.688,28.852 55.778,28.943 v1(55.778,36.881)
  Bottom Layer w0.152: v1(11.125,43.738) 11.277,43.738 13.106,45.568 33.376,45.568 36.271,42.672 38.252,42.672 40.207,42.672 40.512,42.672 41.605,41.579 41.605,41.274 41.605,39.319 41.605,36.881 42.367,36.119 53.645,36.119 54.407,36.881 v1(55.778,36.881)
A24: IC1.107 IC2.4 R15.2 | length 90
  Top Layer w0.152: v1(10.058,44.501) 10.234,44.501 10.368,44.367 11.551,44.367 11.641,44.456 11.641,45.259 IC1.107@11.714,45.333 ; v1(53.035,37.186) 53.061,37.16 53.061,28.954 R15.2@53.162,28.852 ; v1(69.037,41.453) 70.104,42.52 70.104,48.616 70.409,48.92 IC2.4@71.316,48.92
  Bottom Layer w0.152: v1(10.058,44.501) 11.43,45.872 33.502,45.872 34.416,44.958 38.71,44.958 41.91,41.758 41.91,37.338 42.824,36.424 52.273,36.424 v1(53.035,37.186) 53.035,40.538 53.95,41.453 v1(69.037,41.453)
A25: IC1.108 IC2.2 R4.2 | length 94.4
  Top Layer w0.152: v1(10.211,45.872) 10.271,45.812 10.735,45.812 10.925,45.622 11.141,45.622 11.214,45.548 IC1.108@11.214,45.333 ; v1@50.444,53.95 v1(50.444,37.186) 50.444,29.081 R4.2@50.673,28.852
  Bottom Layer w0.152: v1(10.211,45.872) 10.274,45.936 10.731,45.936 10.973,46.177 33.68,46.177 34.595,45.263 38.479,45.263 38.836,45.263 42.215,41.884 42.215,41.527 42.215,37.643 43.129,36.728 49.987,36.728 v1(50.444,37.186) ; v1@50.444,53.95 50.495,54 IC2.2@71.316,54
  other v1: 50.46,53.859
ABE: IC1.74 SK1.C16 | length 186.8
  Top Layer w0.152: v1(27.991,49.666) 27.991,49.49 28.214,49.267 IC1.74@28.214,45.333
  Bottom Layer w0.152: v1(27.991,49.666) 31.106,49.666 33.071,47.701 38.226,47.701 43.103,42.824 50.699,42.824 54.052,46.177 68.123,46.177 69.19,47.244 69.19,48.616 70.714,50.14 93.116,50.14 94.183,49.073 94.183,35.204 94.488,34.9 107.747,34.9 108.052,34.595 108.052,33.071 108.356,32.766 123.444,32.766 123.596,32.614 123.596,15.392 123.139,14.935 82.601,14.935 82.296,14.63 82.296,12.497 82.601,12.192 83.21,12.192 83.627,11.775 SK1.C16@83.627,10.541
Abort: IC1.138 SK1.C20 | length 94.4
  Top Layer w0.152: v1(5.486,28.956) 5.542,28.9 9.171,28.9 IC1.138@9.226,28.845
  Bottom Layer w0.152: v1(5.486,28.956) 6.096,28.346 6.096,22.25 7.925,20.422 7.925,15.697 9.906,13.716 31.116,13.716 41.631,3.2 70.561,3.2 72.341,4.98 72.341,9.415 SK1.C20@73.467,10.541
D0: IC1.7 R43.2 | length 32.2
  Top Layer w0.152: IC1.7@14.214,23.857 14.214,13.065 15.392,11.887 31.955,11.887 33.109,10.734 R43.2@34.633,10.734
D1: IC1.8 R12.2 | length 43.7
  Top Layer w0.152: IC1.8@14.714,23.857 14.714,13.48 16.002,12.192 40.996,12.192 42.304,13.5 42.304,16.98 42.393,17.069 43.33,17.069 R12.2@43.434,16.965
D2: IC1.9 R48.2 | length 46.2
  Top Layer w0.152: IC1.9@15.214,23.857 15.214,13.742 16.459,12.497 40.869,12.497 41.999,13.627 41.999,17.229 42.754,17.983 45.72,17.983 45.872,17.831 45.872,17.475 R48.2@45.974,17.374
D3: IC1.10 R16.2 | length 48.8
  Top Layer w0.152: IC1.10@15.714,23.857 15.714,14.004 16.916,12.802 40.743,12.802 41.694,13.753 41.694,17.355 42.628,18.288 48.362,18.288 48.514,18.136 R16.2@48.514,16.965
D4: IC1.11 R54.2 | length 50.8
  Top Layer w0.152: IC1.11@16.214,23.857 16.214,22.324 16.154,22.264 16.154,14.326 17.374,13.106 40.617,13.106 41.39,13.879 41.39,17.481 42.501,18.593 50.749,18.593 51.054,18.288 R54.2@51.054,16.965
D5: IC1.12 R20.2 | length 53
  Top Layer w0.152: IC1.12@16.714,23.857 16.714,22.393 16.459,22.138 16.459,14.783 17.831,13.411 40.491,13.411 41.085,14.005 41.085,17.607 42.375,18.898 53.289,18.898 53.594,18.593 R20.2@53.594,16.965
D6: IC1.13 R58.2 | length 55.2
  Top Layer w0.152: IC1.13@17.214,23.857 17.214,22.396 16.764,21.946 16.764,15.24 18.288,13.716 40.364,13.716 40.78,14.132 40.78,17.734 42.249,19.202 55.829,19.202 56.134,18.898 R58.2@56.134,16.965
D7: IC1.14 R25.2 | length 57.3
  Top Layer w0.152: IC1.14@17.714,23.857 17.714,22.339 17.069,21.693 17.069,15.545 18.593,14.021 40.238,14.021 40.475,14.258 40.475,17.86 42.123,19.507 57.76,19.507 58.217,19.05 58.217,17.297 58.549,16.965 R25.2@58.674,16.965
D8: IC1.15 R18.2 | length 76.3
  Top Layer w0.152: IC1.15@18.214,23.857 18.214,23.269 18.093,23.148 18.093,22.287 17.374,21.567 17.374,15.85 18.898,14.326 38.297,14.326 38.62,14.649 v1(38.71,14.649)
  Bottom Layer w0.152: v1(38.71,14.649) 38.71,6.984 41.884,3.81 58.674,3.81 59.588,4.724 59.588,16.637 59.842,16.891 63.041,16.891 R18.2@63.119,16.813
D9: IC1.20 R31.2 | length 75.6
  Top Layer w0.152: IC1.20@20.714,23.857 20.714,22.415 20.879,22.25 21.488,22.25 21.793,21.946 21.793,15.088 22.25,14.63 37.23,14.63 37.554,14.954 v1(37.643,14.954)
  Bottom Layer w0.152: v1(37.643,14.954) 37.643,14.326 38.405,13.564 38.405,6.858 41.758,3.505 63.703,3.505 64.618,4.42 64.618,11.989 64.465,12.141 64.465,16.459 64.719,16.713 65.578,16.713 R31.2@65.677,16.813
D10: IC1.21 R22.2 | length 59
  Top Layer w0.152: IC1.21@21.214,23.857 21.288,23.783 21.288,22.908 22.098,22.098 22.098,15.716 v1(22.555,15.259)
  Bottom Layer w0.152: v1(22.555,15.259) 22.628,15.186 23.066,15.186 23.165,15.088 33.092,15.088 37.36,19.355 67.818,19.355 68.235,18.938 R22.2@68.235,16.813
D11: IC1.22 R37.2 | length 60.7
  Top Layer w0.152: IC1.22@21.714,23.857 21.714,22.939 22.403,22.25 22.403,16.764 v1(22.86,16.307)
  Bottom Layer w0.152: v1(22.86,16.307) 23.774,15.392 32.966,15.392 37.233,19.66 70.434,19.66 70.793,19.301 R37.2@70.793,16.813
D12: IC1.23 R27.2 | length 62.7
  Top Layer w0.152: IC1.23@22.214,23.857 22.214,22.896 22.708,22.403 22.708,17.374 v1(23.927,16.154)
  Bottom Layer w0.152: v1(23.927,16.154) 24.384,15.697 32.84,15.697 37.107,19.964 72.949,19.964 72.993,19.92 73.025,19.889 73.351,19.562 R27.2@73.351,16.813
D13: IC1.24 R42.2 | length 64.9
  Top Layer w0.152: IC1.24@22.714,23.857 22.714,22.827 23.012,22.529 23.012,17.805 23.596,17.221 24.386,17.221 24.994,16.613 v1(24.994,16.459)
  Bottom Layer w0.152: v1(24.994,16.459) 25.451,16.002 32.714,16.002 36.981,20.269 75.54,20.269 75.584,20.225 75.615,20.193 75.909,19.9 R42.2@75.909,16.813
D14: IC1.25 R33.2 | length 67
  Top Layer w0.152: IC1.25@23.214,23.857 23.214,22.758 23.317,22.655 23.317,18.072 23.864,17.526 25.281,17.526 26.043,16.764 v1(26.06,16.764)
  Bottom Layer w0.152: v1(26.06,16.764) 26.143,16.764 26.6,16.307 32.587,16.307 36.855,20.574 78.003,20.574 78.467,20.11 R33.2@78.467,16.813